# EAGLE board plugV6-Relay-NC-6 (EAGLE 7.5.0)
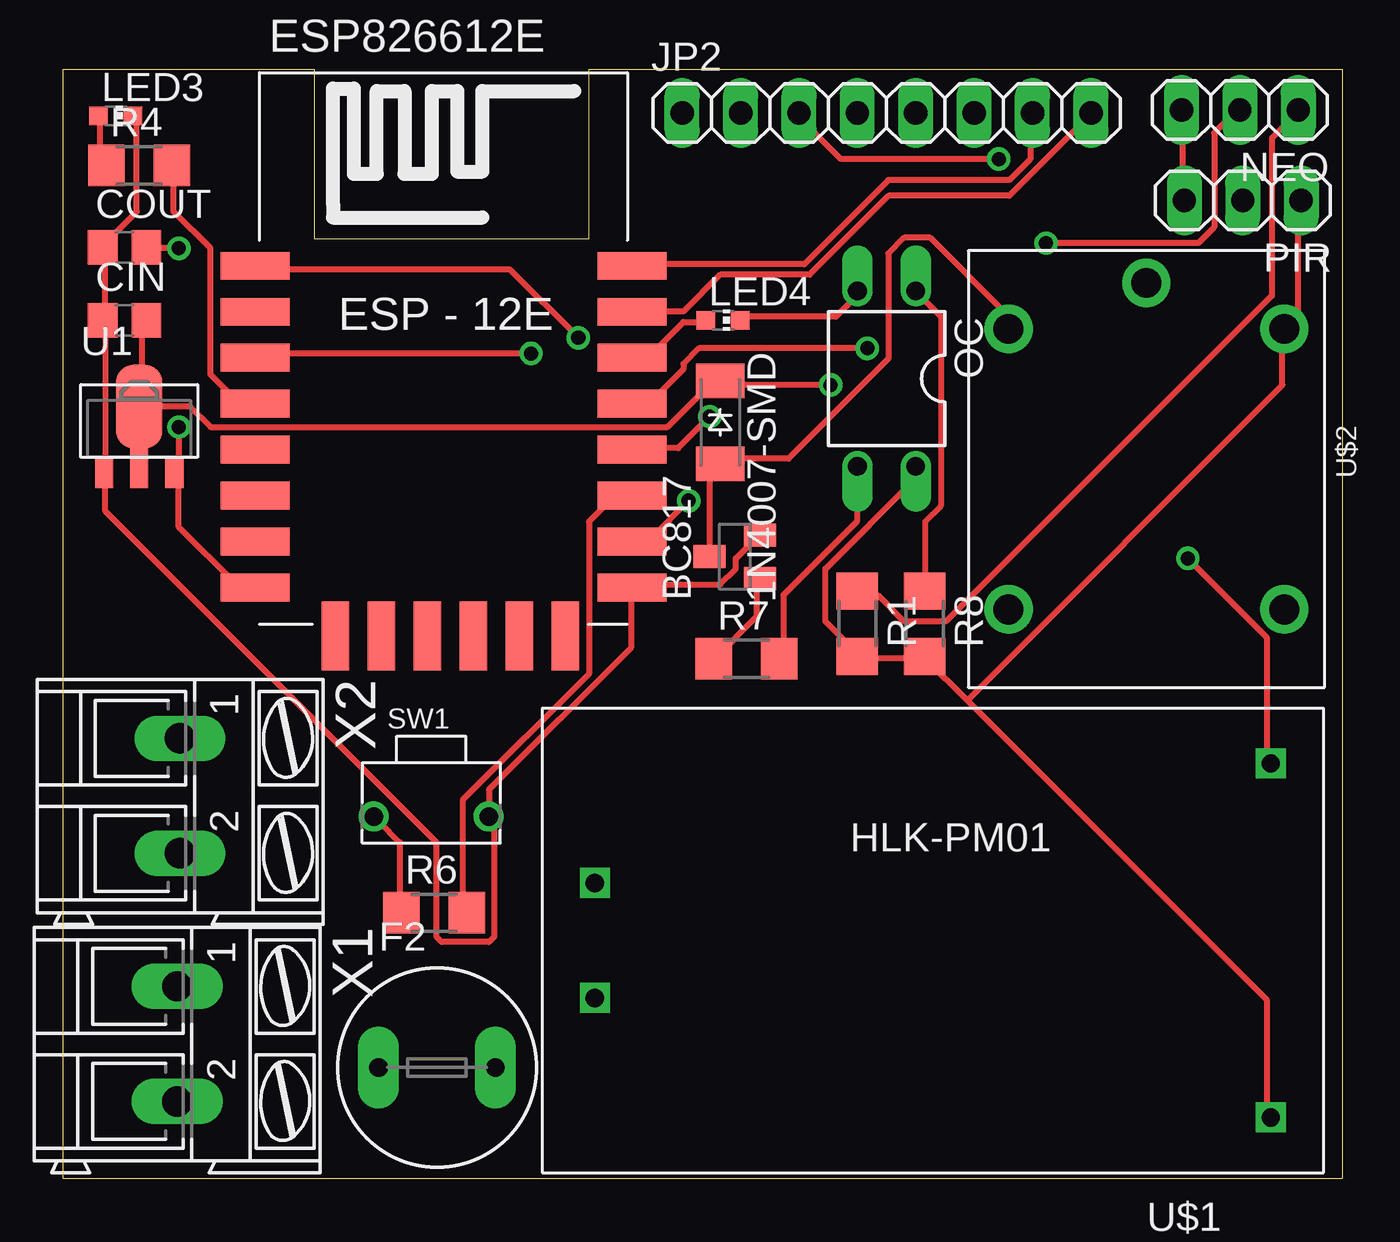
[diagram p0: board, top side]
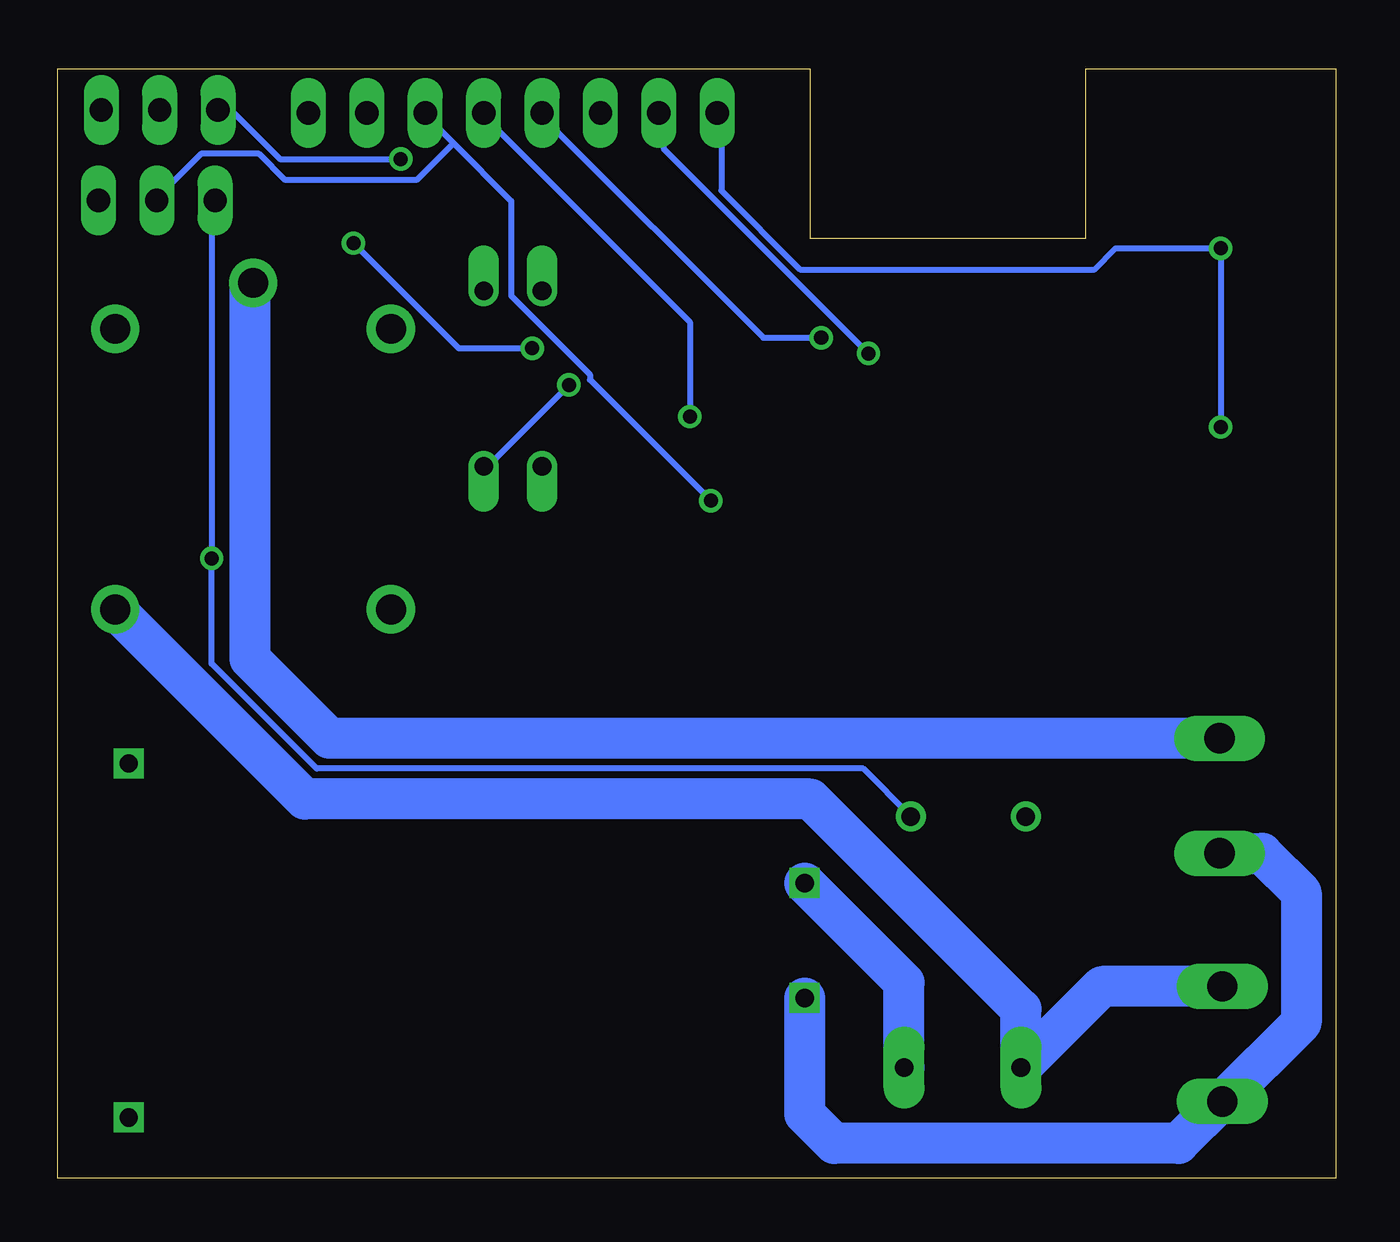
[diagram p1: board, bottom side, seen from below]

Size 55.63 x 48.26 mm. Coordinates in mm from the lower left corner, seen from the top.
Outline: 0,0 55.63,0 55.63,48.26 22.86,48.26 22.86,40.89 10.92,40.89 10.92,48.26 0,48.26 0,0
Copper layers (1*16): Top 0.035mm / dielectric 1.5mm / Bottom 0.035mm
Design rules "default": minimum track width 10mil, minimum drill 24mil, track to track 8mil, track to pad 8mil, pad to pad 8mil, via to via 8mil, smd to smd 8mil, copper to edge 40mil, drill to drill 8mil, minimum pad ring 10mil, minimum via ring 8mil, stop-mask expansion 4mil, vias tented up to drill 0mil, thermal gap 10mil

## Footprints (pad centres in the part's own frame; a part is rotated, then mirrored left to right if it is on the bottom)
SOD-123_MINI-SMA = smd 1.5 x 2.1: A 1.8,0; C -1.8,0
SOT23-BEC = smd 1 x 1.4: B -0.95,-1.1; C 0,1.1; E 0.95,-1.1
C0805 = smd 1.3 x 1.5: 1 -0.95,0; 2 0.95,0
ESP12E-SMD = smd 3 x 1.2: ADC -8.3,3.8; CH_PD -8.3,1.8; GND 8.1,-8.2; GPIO0 8.1,-2.2; GPIO2 8.1,-4.2; GPIO4 8.1,-0.2; GPIO5 8.1,1.8; GPIO12 -8.3,-4.2; GPIO13 -8.3,-6.2; GPIO14 -8.3,-2.2; GPIO15 8.1,-6.2; GPIO16 -8.3,-0.2; RESET -8.3,5.8; RXD0 8.1,3.8; TXD0 8.1,5.8; VCC -8.3,-8.2 | smd 1.2 x 3: CS0 -4.8,-10.3; GPIO9 -0.8,-10.3; GPIO10 1.2,-10.3; MISO -2.8,-10.3; MOSI 3.2,-10.3; SCLK 5.2,-10.3
TR5 = drill 0.813 pad 1.778 long: 1 -2.54,0; 2 2.54,0
1X08 = drill 1.016 long: 1 -8.89,0; 2 -6.35,0; 3 -3.81,0; 4 -1.27,0; 5 1.27,0; 6 3.81,0; 7 6.35,0; 8 8.89,0
CHIP-LED0603 = smd 0.8 x 0.8: A 0,-0.75; C 0,0.75
1X03 = drill 1.016 long: 1 -2.54,0; 2 0,0; 3 2.54,0
DIL04 = drill 0.813 offset: 1 -1.27,-3.81; 2 1.27,-3.81; 3 1.27,3.81; 4 -1.27,3.81
R1206 = smd 1.6 x 1.803: 1 -1.422,0; 2 1.422,0
SW2-5.0-6.0X3.0X4.3MM = drill 0.8 pad 1.27: 1 -2.5,0; 2 2.5,0
SOT89 = smd 0.8 x 1.4: 1 -1.524,-1.905; 3 1.524,-1.905 | smd 0.8 x 1.9: 2 0,-1.651 | smd 2.032 x 3.65: 4 0,0.94
HLK-PM01 = drill 0.8 square: +5V 15.19,-7.76; AC1 -14.21,2.44; AC2 -14.21,-2.56; GND 15.19,7.64
RELAY-SONGLE = drill 1.3 pad 2.1: COM -8.1,0; NC 6.1,6; NO 6.1,-6; V+ -6.1,6; V- -6.1,-6
AK300/2 = drill 1.321 long: 1 -2.515,0; 2 2.489,0

## Placement (x,y rotation side)
1N4007-SMD  CGRM4007-G  [SOD-123_MINI-SMA]  28.57,32.89 270 top
BC817  SOT23  [SOT23-BEC]  29.21,27.05 90 top
CIN  1uF  [C0805]  2.67,37.34 0 top
COUT  1uF  [C0805]  2.67,40.51 0 top
ESP826612E  Value  [ESP12E-SMD]  16.64,33.91 0 top
F2  [TR5]  16.26,4.83 0 top
JP2  Interface PIN  [1X08]  35.81,46.35 0 top
LED3  0805  [CHIP-LED0603]  2.29,46.23 270 top
LED4  0805-relay  [CHIP-LED0603]  28.7,37.34 270 top
NEO  [1X03]  51.18,46.48 180 top
OC  PC817  [DIL04]  35.81,34.8 180 top
PIR  [1X03]  51.31,42.55 180 top
R1  230  [R1206]  34.54,24.13 270 top
R4  230  [R1206]  3.3,44.07 0 top
R6  470  [R1206]  16.13,11.56 0 top
R7  470  [R1206]  29.72,22.61 0 top
R8  1K  [R1206]  37.47,24.13 270 top
SW1  [SW2-5.0-6.0X3.0X4.3MM]  16,15.75 0 top
U1  XC6206PR  [SOT89]  3.3,32.64 0 top
U$1  HLK-PM01  [HLK-PM01]  37.34,10.41 0 top
U$2  RELAY-SONGLE  [RELAY-SONGLE]  47.12,30.86 270 top
X1  220V  [AK300/2]  4.95,5.84 270 top
X2  Plug  [AK300/2]  5.08,16.64 270 top

## Library data of the parts
1N4007-SMD = diode
BC817 = transistor-neu-to92
CIN COUT R1 R4 R6-R8 = rcl
ESP826612E = esp8266modules
F2 = fuse; OC_FARNELL: unknown; OC_NEWARK: unknown
JP2 NEO PIR = pinhead
LED3 LED4 = led
OC = optocoupler; MPN: PC817X4J000F; OC_FARNELL: 9707727; OC_NEWARK: 97K7059
SW1 = Seeed-OPL-Switch
U1 = IC
U$1 = HLK-PM01
U$2 = Seeed-OPL-Relay
X1 X2 = con-ptr500; OC_FARNELL: unknown; OC_NEWARK: unknown

## Nets
+5V: 1N4007-SMD.C CIN.2 OC.4 PIR.1 R1.2 R8.2 U1.2 U1.4 U$1.+5V U$2.V+
EN: ESP826612E.CH_PD JP2.2
GND: BC817.E CIN.1 COUT.1 ESP826612E.GND JP2.3 LED3.C NEO.3 PIR.3 SW1.2 U1.1 U$1.GND
GPIO0: ESP826612E.GPIO0 JP2.5
GPIO2: ESP826612E.GPIO2 R6.2
GPIO4: ESP826612E.GPIO4 NEO.2
GPIO5: ESP826612E.GPIO5 LED4.A
GPIO12: ESP826612E.GPIO12
GPIO13: ESP826612E.GPIO13
GPIO14: ESP826612E.GPIO14
GPIO15: ESP826612E.GPIO15 JP2.6 PIR.2
GPIO16: ESP826612E.GPIO16 R4.2
N$1: F2.1 U$2.NC X1.1
N$2: F2.2 U$1.AC1
N$3: U$1.AC2 X1.2 X2.2
N$4: U$2.COM X2.1
N$5: OC.3 R7.2
N$6: BC817.B R7.1
N$7: R6.1 SW1.1
N$8: LED3.A R4.1
N$9: NEO.1 R1.1
N$13: OC.1 R8.1
N$15: LED4.C OC.2
N$18: 1N4007-SMD.A BC817.C U$2.V-
RST: ESP826612E.RESET JP2.4
RX: ESP826612E.RXD0 JP2.8
TX: ESP826612E.TXD0 JP2.7
V33: COUT.2 ESP826612E.VCC JP2.1 U1.3

## Tracks (layer width: path | path; a pad name or v marks a point on that pad's centre or on a via)
+5V  (via drill 0.61)
  Top 0.254: 3.43,33.6 3.43,37.26 CIN.2 | U1.2 3.43,31.09 3.43,33.38 U1.4 3.43,33.6 | 28.57,34.52 28.12,34.52 26.29,32.69 6.4,32.69 5.49,33.6 3.43,33.6 | PIR.1 53.72,42.52 53.72,37.49 53.26,37.03 U$2.V+ 53.03,36.8 53.03,34.52 39.32,20.8 | 39.32,20.8 37.49,22.63 R8.2 37.26,22.63 34.75,22.63 R1.2 34.52,22.86 33.15,24.23 33.15,26.52 37.03,30.4 37.03,30.86 OC.4 | 39.32,20.8 52.35,7.77 52.35,2.74 U$1.+5V | v33.38,34.52 28.57,34.52 | 28.57,34.52 1N4007-SMD.C
  Bottom 0.254: v33.38,34.52 37.03,30.86 OC.4
EN  (via drill 0.61)
  Top 0.254: v20.34,35.89 8.46,35.89 ESP826612E.CH_PD
  Bottom 0.254: v20.34,35.89 29.26,44.81 29.26,46.18 JP2.2
GND  (via drill 0.61)
  Top 0.254: v40.69,44.35 33.83,44.35 32,46.18 JP2.3 | v48.92,26.98 52.35,23.55 52.35,18.06 U$1.GND | NEO.3 48.69,46.41 48.69,42.75 PIR.3 | LED3.C 3.2,46.18 3.2,42.06 1.83,40.69 COUT.1 1.83,40.46 1.83,37.49 CIN.1 1.83,37.26 1.83,30.86 U1.1 1.83,30.63 1.83,29.03 16.23,14.63 16.23,10.52 16.46,10.29 18.52,10.29 18.75,10.52 18.75,15.32 18.52,15.54 SW1.2 18.52,15.77 18.52,16.92 24.69,23.09 24.69,25.6 ESP826612E.GND 24.92,25.83 28.57,25.83 29.26,26.52 29.26,26.98 30.18,27.89 BC817.E
  Bottom 0.254: v40.69,44.35 45.95,44.35 48.01,46.41 48.46,46.41 NEO.3 | PIR.3 48.92,42.52 v48.92,26.98 48.92,22.4 44.35,17.83 20.57,17.83 18.52,15.77 SW1.2
GPIO0  (via drill 0.61)
  Top 0.254: v28.12,33.15 26.75,31.77 24.92,31.77 ESP826612E.GPIO0
  Bottom 0.254: v28.12,33.15 28.12,37.26 37.03,46.18 JP2.5
GPIO2
  Top 0.254: R6.2 17.37,11.66 17.37,16.46 22.86,21.95 22.86,28.57 23.77,29.49 24.69,29.49 ESP826612E.GPIO2
GPIO4  (via drill 0.61)
  Top 0.254: v34.98,36.12 27.66,36.12 26.98,35.43 26.98,35.2 25.6,33.83 24.92,33.83 ESP826612E.GPIO4 | v42.75,40.69 49.38,40.69 50.06,41.38 50.06,45.49 50.98,46.41 NEO.2
  Bottom 0.254: v34.98,36.12 38.18,36.12 v42.75,40.69
GPIO5
  Top 0.254: LED4.A 27.89,37.26 26.98,37.26 25.6,35.89 24.92,35.89 ESP826612E.GPIO5
GPIO15  (via drill 0.61)
  Top 0.254: v27.2,29.49 25.6,27.89 24.92,27.89 ESP826612E.GPIO15
  Bottom 0.254: v27.2,29.49 32.46,34.75 32.46,34.98 35.89,38.41 35.89,42.52 38.41,45.03 | 38.41,45.03 39.55,46.18 JP2.6 | 38.41,45.03 40.01,43.43 45.72,43.43 46.86,44.58 49.38,44.58 51.21,42.75 PIR.2
GPIO16
  Top 0.254: R4.2 4.8,43.89 4.8,42.06 6.4,40.46 6.4,34.98 7.54,33.83 8.23,33.83 ESP826612E.GPIO16
N$1
  Bottom 1.778: X1.1 10.19,8.36 F2.1 13.72,7.37 22.86,16.51 44.87,16.51 U$2.NC
N$2
  Bottom 1.778: F2.2 18.8,8.52 U$1.AC1
N$3
  Bottom 1.778: X2.2 3.23,14.15 1.52,12.45 1.52,6.78 X1.2 5.03,3.35 6.86,1.52 21.84,1.52 23.11,2.79 23.11,7.84 U$1.AC2
N$4
  Bottom 1.778: X2.1 43.79,19.15 47.24,22.61 47.24,38.83 U$2.COM
N$5
  Top 0.254: R7.2 31.32,22.63 31.32,25.38 34.52,28.57 34.52,30.86 OC.3
N$6
  Top 0.254: BC817.B 30.18,26.06 30.18,24.46 28.35,22.63 R7.1
N$7
  Top 0.254: R6.1 14.63,11.66 14.63,14.63 13.72,15.54 SW1.1
N$8
  Top 0.254: LED3.A 1.6,46.18 1.6,44.35 1.83,44.12 R4.1
N$9
  Top 0.254: R1.1 34.75,25.38 35.43,25.38 36.58,24.23 38.41,24.23 52.58,38.41 52.58,45.26 53.72,46.41 NEO.1
N$13
  Top 0.254: R8.1 37.49,25.6 37.49,28.57 38.18,29.26 38.18,37.49 37.26,38.41 OC.1
N$15
  Top 0.254: LED4.C 29.49,37.49 33.6,37.49 34.52,38.41 OC.2
N$18
  Top 0.254: BC817.C 28.12,27.2 28.12,30.63 1N4007-SMD.A 28.57,31.32 31.55,31.32 35.89,35.66 35.89,40.23 36.58,40.92 37.72,40.92 40.92,37.72 40.92,37.03 U$2.V-
RST  (via drill 0.61)
  Top 0.254: v22.4,36.58 19.43,39.55 8.46,39.55 ESP826612E.RESET
  Bottom 0.254: v22.4,36.58 24.92,36.58 34.52,46.18 JP2.4
RX
  Top 0.254: ESP826612E.RXD0 24.92,37.72 26.98,37.72 28.57,39.32 32.46,39.32 35.89,42.75 41.15,42.75 44.58,46.18 JP2.8
TX
  Top 0.254: ESP826612E.TXD0 24.92,39.78 32.23,39.78 35.89,43.43 41.15,43.43 42.06,44.35 42.06,46.18 JP2.7
V33  (via drill 0.61)
  Top 0.254: ESP826612E.VCC 8.23,25.83 7.54,25.83 5.03,28.35 5.03,30.63 U1.3 5.03,30.86 v5.03,32.69 | v5.03,40.46 3.66,40.46 COUT.2
  Bottom 0.254: JP2.1 26.75,46.18 26.75,42.98 23.32,39.55 10.52,39.55 9.6,40.46 v5.03,40.46 v5.03,32.69